# EAGLE board PowerNode2 (EAGLE 9.2.2)
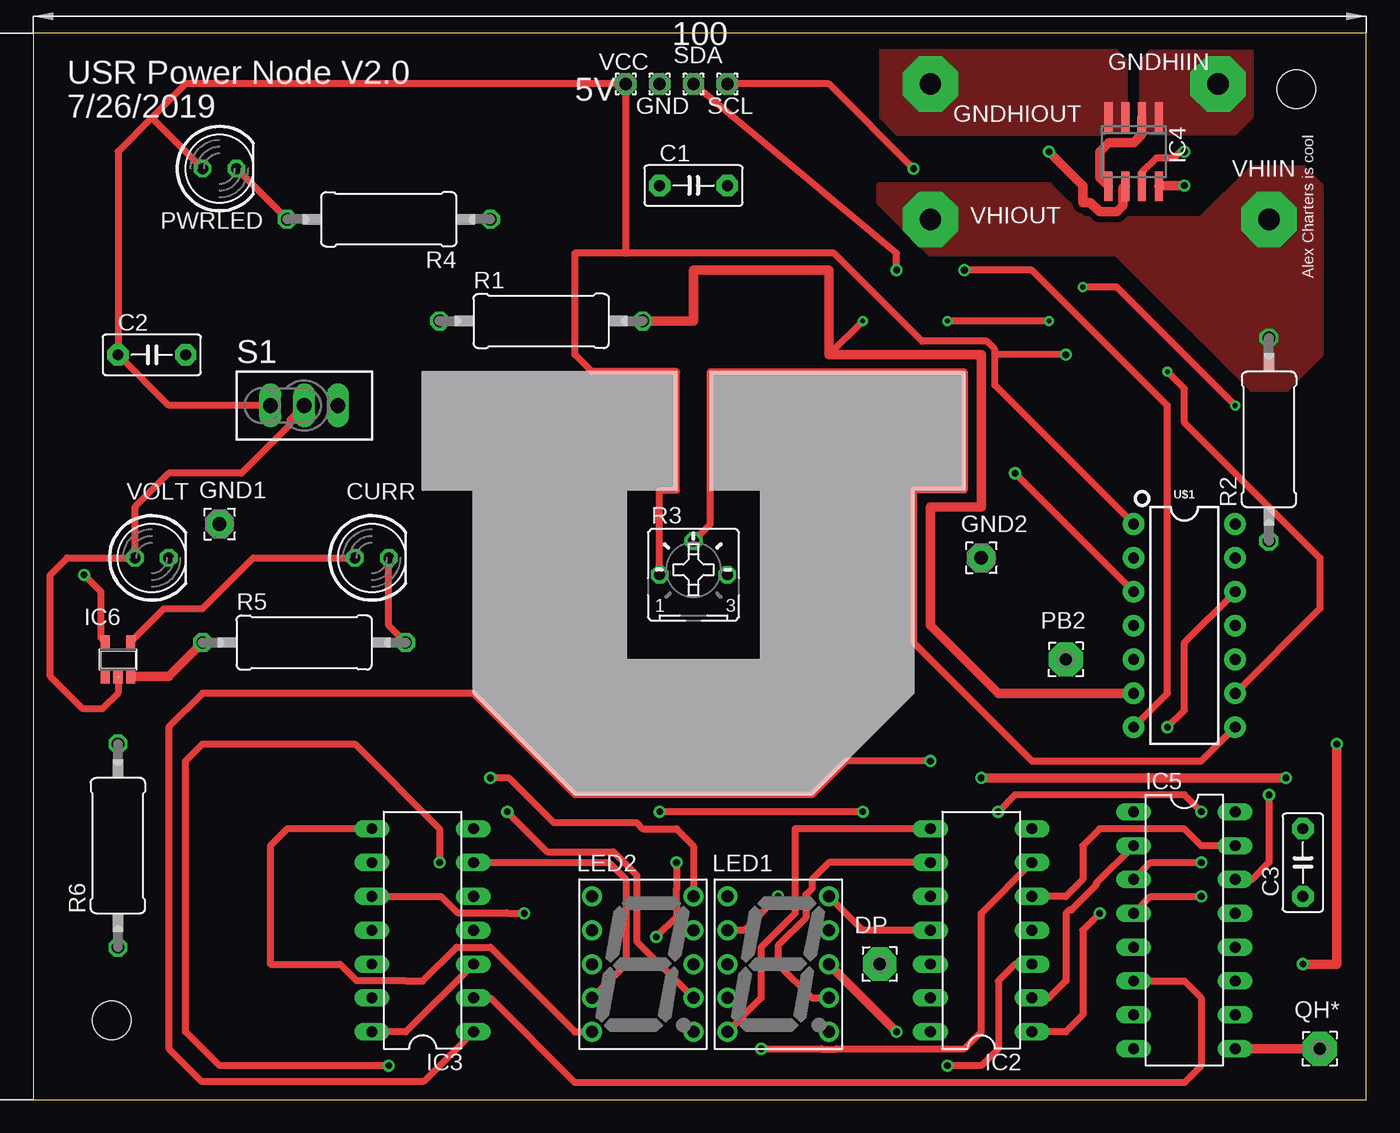
[diagram p0: board, top side]
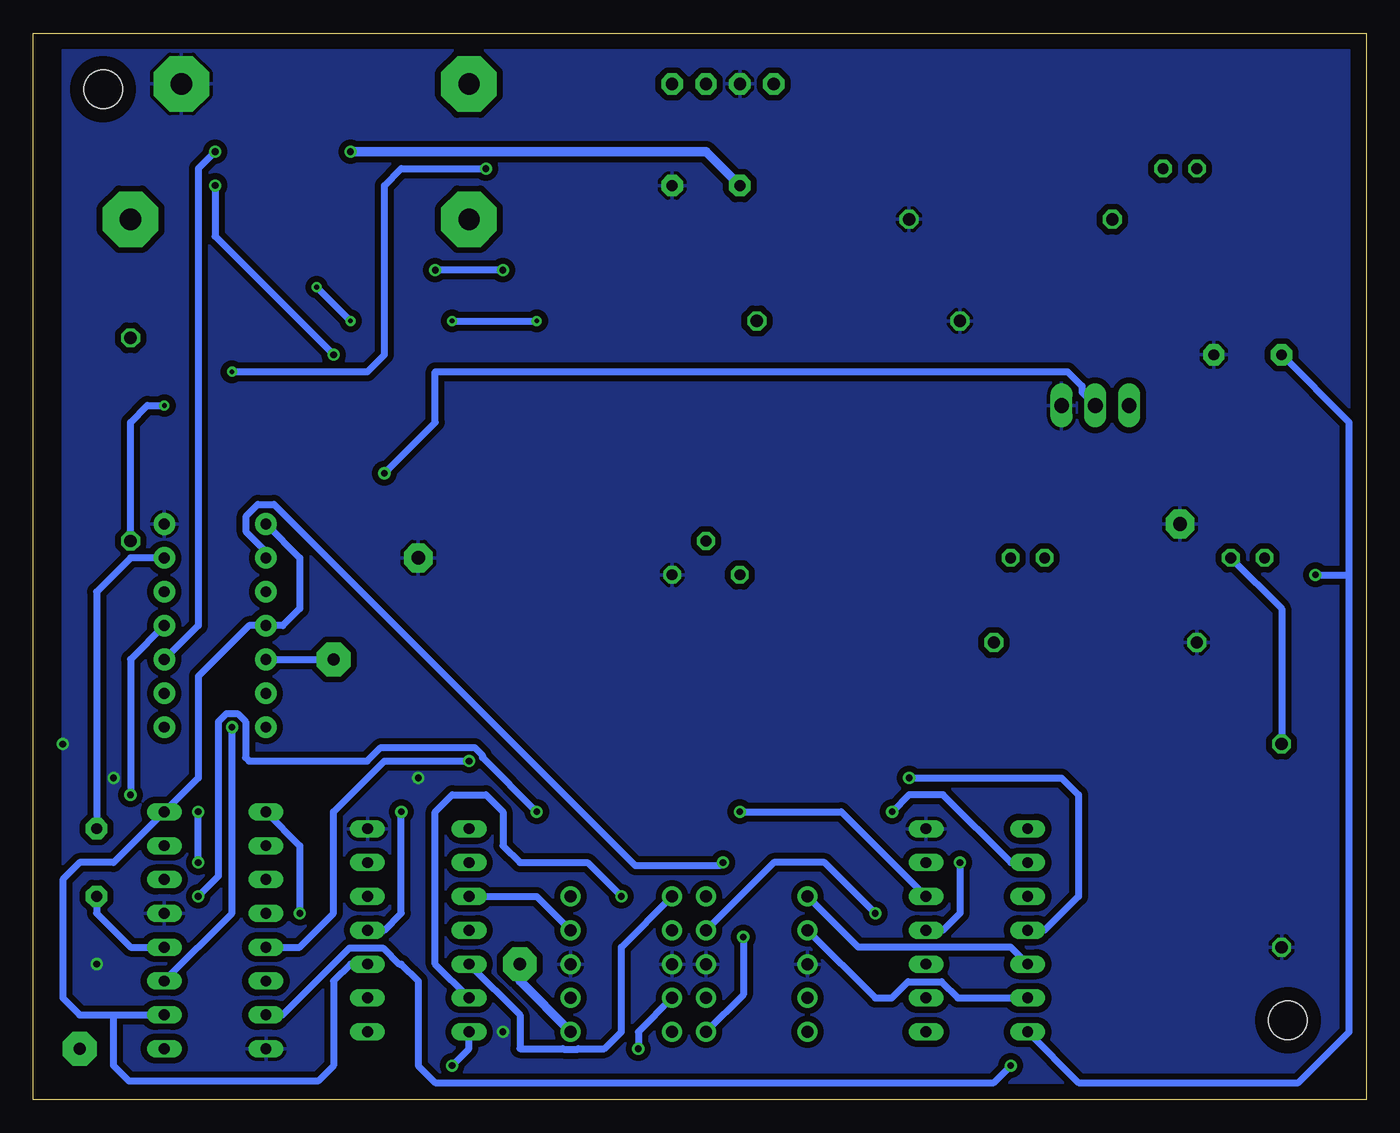
[diagram p1: board, bottom side, seen from below]

Size 100 x 80 mm. Coordinates in mm from the lower left corner, seen from the top.
Outline: 0,0 100,0 100,80 0,80 0,0
Copper layers (1*16): Top 0.035mm / dielectric 1.5mm / Bottom 0.035mm
Design rules "default": minimum track width 6mil, minimum drill 0.35mm, track to track 6mil, track to pad 6mil, pad to pad 6mil, via to via 6mil, smd to smd 6mil, copper to edge 40mil, drill to drill 6mil, minimum pad ring 10mil, minimum via ring 8mil, stop-mask expansion 4mil, vias tented up to drill 0mil, thermal gap 10mil
Net classes: 0 default: width 0.508 mm, drill 0.305 mm, clearance 0.305 mm; 1 high power: width 0.711 mm, drill 0.457 mm, clearance 0.457 mm
Holes 2.9 mm at 5.87,5.95 94.77,75.8

## Footprints (pad centres in the part's own frame; a part is rotated, then mirrored left to right if it is on the bottom)
C5B3 = drill 0.813 pad 1.6 octagon: 1 -2.54,0; 2 2.54,0
LED5MM = drill 0.813 octagon: A -1.27,0; K 1.27,0
2,54/0,9 = drill 0.914 pad 2.54 octagon: 1 0,0
1,6/0,9 = drill 0.914 pad 1.6 octagon: 1 0,0
2,15/1,0 = drill 1.016 pad 2.159 octagon: 1 0,0
4,16O1,6 = drill 1.6 pad 4.166 octagon: 1 0,0
DIL14 = drill 0.813 long: 1 -7.62,-3.81; 2 -5.08,-3.81; 3 -2.54,-3.81; 4 0,-3.81; 5 2.54,-3.81; 6 5.08,-3.81; 7 7.62,-3.81; 8 7.62,3.81; 9 5.08,3.81; 10 2.54,3.81; 11 0,3.81; 12 -2.54,3.81; 13 -5.08,3.81; 14 -7.62,3.81
SOIC8 = smd 0.6 x 2.2: 1 -1.905,-2.6; 2 -0.635,-2.6; 3 0.635,-2.6; 4 1.905,-2.6; 5 1.905,2.6; 6 0.635,2.6; 7 -0.635,2.6; 8 -1.905,2.6
DIL16 = drill 0.813 long: 1 -8.89,-3.81; 2 -6.35,-3.81; 3 -3.81,-3.81; 4 -1.27,-3.81; 5 1.27,-3.81; 6 3.81,-3.81; 7 6.35,-3.81; 8 8.89,-3.81; 9 8.89,3.81; 10 6.35,3.81; 11 3.81,3.81; 12 1.27,3.81; 13 -1.27,3.81; 14 -3.81,3.81; 15 -6.35,3.81; 16 -8.89,3.81
SOT23-5 = smd 0.69 x 0.99: 1 -0.95,-1.29; 2 0,-1.29; 3 0.95,-1.29; 4 0.95,1.3; 5 -0.95,1.3
S4301B = drill 0.9 pad 1.5: 1 -3.81,5.08; 2 -3.81,2.54; 3 -3.81,0; 4 -3.81,-2.54; 5 -3.81,-5.08; 6 3.81,-5.08; 7 3.81,-2.54; 8 3.81,0; 9 3.81,2.54; 10 3.81,5.08
0411/15 = drill 0.914 octagon: 1 -7.62,0; 2 7.62,0
B25P = drill 0.813 octagon: A -2.54,0; E 2.54,0; S 0,2.54
TL3XPO = drill 1.1 pad 1.422 long: 1 -2.54,0; 2 0,0; 3 2.54,0
DIP14 = drill 0.813 pad 1.626: 1 -7.62,-3.81; 2 -5.08,-3.81; 3 -2.54,-3.81; 4 0,-3.81; 5 2.54,-3.81; 6 5.08,-3.81; 7 7.62,-3.81; 8 7.62,3.81; 9 5.08,3.81; 10 2.54,3.81; 11 0,3.81; 12 -2.54,3.81; 13 -5.08,3.81; 14 -7.62,3.81

## Placement (x,y rotation side)
C1  1nF  [C5B3]  49.53,68.58 0 top
C2  0.1uF  [C5B3]  8.89,55.88 0 top
C3  0.1uF  [C5B3]  95.25,17.78 90 top
CURR  [LED5MM]  25.4,40.64 0 top
DP  [2,54/0,9]  63.5,10.16 0 top
GND  WIREPAD1,6/0,9  [1,6/0,9]  46.99,76.2 0 top
GND1  [2,15/1,0]  13.97,43.18 0 top
GND2  [2,15/1,0]  71.12,40.64 0 top
GNDHIIN  WIREPAD4,16O1,6  [4,16O1,6]  88.9,76.2 0 top
GNDHIOUT  WIREPAD4,16O1,6  [4,16O1,6]  67.31,76.2 0 top
IC2  74LS49N  [DIL14]  71.12,12.7 90 top
IC3  74LS49N  [DIL14]  29.21,12.7 90 top
IC4  ACS712-LC  [SOIC8]  82.55,71.12 180 top
IC5  74LS595N  [DIL16]  86.36,12.7 270 top
IC6  74AHCT1G04DBV  [SOT23-5]  6.35,33.02 0 top
LED1  S4301B  [S4301B]  55.88,10.16 0 top
LED2  S4301B  [S4301B]  45.72,10.16 0 top
PB2  [2,54/0,9]  77.47,33.02 0 top
PWRLED  [LED5MM]  13.97,69.85 0 top
QH*  [2,54/0,9]  96.52,3.81 0 top
R1  300k  [0411/15]  38.1,58.42 0 top
R2  1.2M  [0411/15]  92.71,49.53 90 top
R3  [B25P]  49.53,39.37 0 top
R4  330  [0411/15]  26.67,66.04 180 top
R5  330  [0411/15]  20.32,34.29 0 top
R6  330  [0411/15]  6.35,19.05 90 top
S1  TL32PO  [TL3XPO]  20.32,52.07 0 top
SCL  WIREPAD1,6/0,9  [1,6/0,9]  52.07,76.2 0 top
SDA  WIREPAD1,6/0,9  [1,6/0,9]  49.53,76.2 0 top
U$1  ATTINY84ATTINY84-20PU  [DIP14]  86.36,35.56 270 top
VCC  WIREPAD1,6/0,9  [1,6/0,9]  44.45,76.2 0 top
VHIIN  WIREPAD4,16O1,6  [4,16O1,6]  92.71,66.04 0 top
VHIOUT  WIREPAD4,16O1,6  [4,16O1,6]  67.31,66.04 0 top
VOLT  [LED5MM]  8.89,40.64 0 top

## Library data of the parts
C1-C3 = capacitor-wima
CURR PWRLED VOLT = led
DP GND GND1 GND2 GNDHIIN GNDHIOUT PB2 QH* SCL SDA VCC VHIIN VHIOUT = wirepad
IC2 IC3 IC5 = 74xx-us
IC4 = allegro-2
IC6 = 74xx-little-de
LED1 LED2 = led-7-segment; OC_FARNELL: unknown; OC_NEWARK: unknown
R1 R2 R4-R6 = resistor
R3 = pot
S1 = switch
U$1 = SparkFun-IC-Microcontroller

## Nets
CALIB: R3.S U$1.8
CURRIN: IC4.7 U$1.10
DISPSEL: IC6.2 S1.2 U$1.3 VOLT.A
GND [high power]: C1.2 C2.2 GND1.1 GND2.1 GND.1 GNDHIIN.1 IC2.7 IC3.7 IC4.1 IC4.2 IC4.5 IC5.8 IC5.13 IC6.3 LED1.3 LED1.8 LED2.3 LED2.8 R1.1 R3.E R4.1 R5.1 R6.1 S1.3 U$1.14
GNDHIOUT: GNDHIOUT.1 IC4.3 IC4.4
N$1: C1.1 IC4.6
N$2: IC5.14 U$1.11
N$3: IC2.6 LED1.4
N$4: SCL.1 U$1.9
N$6: SDA.1 U$1.7
N$7: IC2.8 LED1.5
N$8: IC2.9 LED1.7
N$9: IC2.10 LED1.9
N$10: IC2.11 LED1.10
N$11: IC2.12 LED1.1
N$12: IC2.13 LED1.2
N$13: IC3.13 LED2.2
N$14: IC3.8 LED2.5
N$15: IC3.10 LED2.9
N$16: IC3.11 LED2.10
N$17: IC3.9 LED2.7
N$18: IC3.6 LED2.4
N$19: IC3.12 LED2.1
N$20: IC2.5 IC5.15
N$21: IC2.1 IC5.1
N$22: IC2.2 IC5.2
N$23: IC2.4 IC5.3
N$24: IC3.5 IC5.4
N$25: IC3.1 IC5.5
N$26: IC3.2 IC5.6
N$27: IC3.4 IC5.7
N$28: IC5.11 U$1.12
N$29: C3.1 IC5.12
N$30: C3.2 U$1.13
N$31: LED2.6 U$1.2
N$32: PB2.1 U$1.5
N$33: PWRLED.K R4.2
N$34: CURR.K R5.2
N$35: R6.2 VOLT.K
N$36: CURR.A IC6.4
N$37: IC5.9 QH*.1
N$39: DP.1 LED1.6
VCC: C2.1 IC2.3 IC2.14 IC3.3 IC3.14 IC4.8 IC5.10 IC5.16 IC6.5 PWRLED.A R3.A S1.1 U$1.1 U$1.4 VCC.1
VHI [high power]: R2.2 VHIIN.1 VHIOUT.1
VHIOUT: R1.2 R2.1 U$1.6

## Tracks (layer width: path | path; a pad name or v marks a point on that pad's centre or on a via)
CALIB
  Top 0.508: R3.S 50.8,43.18 50.8,54.61 69.85,54.61 69.85,45.72 66.04,45.72 66.04,34.29 74.93,25.4 87.63,25.4 U$1.8
CURRIN  (via drill 0.5 pad 0.55)
  Top 0.508: v86.36,71.12 86.06,71.12 85.58,70.64 84.24,70.64 83.19,69.58 IC4.7
  Bottom 0.508: v86.36,71.12 87.63,69.85 87.63,35.56 U$1.10
DISPSEL  (via drill 0.5 pad 0.55)
  Top 0.508: S1.2 19.27,51.02 19.27,50.63 15.63,46.99 10.16,46.99 7.62,44.45 VOLT.A 2.54,40.64 1.27,39.37 1.27,31.75 3.71,29.31 5.18,29.31 6.35,30.48 IC6.2 | U$1.3 v73.66,46.99
  Bottom 0.508: v73.66,46.99 69.85,50.8 69.85,54.61 22.4,54.61 21.32,53.53 21.32,53.07 S1.2
GND  (via drill 0.5 pad 0.55)
  Top 0.711: v71.12,24.13 v93.98,24.13 | IC6.3 10.14,31.73 R5.1 | v95.25,10.16 97.79,10.16 v97.79,26.67 | LED1.8 v64.77,5.08 | IC4.5 80.01,69.16 80.01,71.12 80.7,71.81 82.55,71.81 83.19,72.44 IC4.2
  pour Bottom: 1.27,78.74 97.79,78.74 97.79,1.27 1.27,1.27
  pour Top (no thermals): 91.44,78.74 91.44,73.66 90.17,72.39 83.82,72.39 83.06,73.15 83.06,73.91 83.06,77.98 83.82,78.74
GNDHIOUT
  pour Top (no thermals): 63.5,78.74 63.5,73.66 64.77,72.39 66.04,72.39 81.28,72.39 82.04,73.15 82.04,77.98 81.28,78.74
N$1  (via drill 0.5 pad 0.55)
  Top 0.711: v76.2,71.12 78.74,68.58 78.74,67.31 79.31,67.31 80.01,66.61 81.28,66.61 81.76,67.08 81.76,68.36 IC4.6
  Bottom 0.711: v76.2,71.12 49.53,71.12 C1.1
N$2  (via drill 0.5 pad 0.55)
  Top 0.508: v92.71,22.86 92.71,17.78 91.44,16.51 IC5.14
  Bottom 0.508: U$1.11 92.71,33.02 v92.71,22.86
N$3  (via drill 0.5 pad 0.55)
  Top 0.508: v54.61,3.81 59.11,3.81 59.15,3.77 60.23,3.77 60.27,3.81 69.85,3.81 71.12,5.08 71.12,13.97 IC2.6
  Bottom 0.508: LED1.4 54.61,5.08 v54.61,3.81
N$4  (via drill 0.35, 0.5)
  Top 0.508: U$1.9 96.52,36.83 96.52,40.64 86.36,50.8 86.36,53.34 v85.09,54.61 | v66.04,69.85 59.69,76.2 SCL.1
  Bottom 0.508: v66.04,69.85 72.39,69.85 73.66,68.58 73.66,55.88 74.93,54.61 v85.09,54.61
N$6  (via drill 0.5)
  Top 0.508: U$1.7 85.09,30.48 85.09,52.07 74.93,62.23 v69.85,62.23 | v64.77,62.23 64.77,63.5 SDA.1
  Bottom 0.508: v64.77,62.23 v69.85,62.23
N$7
  Top 0.508: IC2.8 57.15,20.32 57.15,13.97 54.61,11.43 54.61,7.62 LED1.5
N$8
  Top 0.508: IC2.9 59.69,17.78 58.42,16.51 58.42,15.82 57.96,15.36 57.96,13.63 55.88,11.55 55.88,10.16 58.42,7.62 LED1.7
N$9
  Bottom 0.508: IC2.10 62.23,15.24 LED1.9
N$10
  Top 0.508: IC2.11 62.23,12.7 LED1.10
N$11
  Bottom 0.508: IC2.12 63.5,6.35 63.5,3.81 60.27,3.81 60.23,3.77 59.15,3.77 59.11,3.81 57.15,3.81 55.88,5.08 55.88,11.43 LED1.1
N$12  (via drill 0.5 pad 0.55)
  Top 0.508: v55.88,15.24 53.34,12.7 LED1.2
  Bottom 0.508: IC2.13 69.85,10.16 69.85,21.59 68.58,22.86 66.04,22.86 64.77,21.59 64.77,19.05 63.5,17.78 58.42,17.78 v55.88,15.24
N$13
  Bottom 0.508: LED2.2 36.83,7.62 35.58,7.62 34.36,8.84 31.86,8.84 30.64,7.62 IC3.13
N$14
  Top 0.508: IC3.8 19.05,20.32 17.78,19.05 17.78,10.16 23.02,10.16 24.23,8.94 27.89,8.94 27.94,8.89 29.21,8.89 31.75,11.43 34.29,11.43 40.64,5.08 LED2.5
N$15  (via drill 0.5 pad 0.55)
  Top 0.508: IC3.10 30.6,15.24 31.82,14.02 35.51,14.02 35.56,13.97 v36.83,13.97
  Bottom 0.508: v36.83,13.97 40.64,17.78 44.45,17.78 LED2.9
N$16  (via drill 0.5 pad 0.55)
  Top 0.508: v34.29,24.13 35.68,24.13 39.03,20.78 45.26,20.78 45.72,20.32 48.26,20.32 49.53,19.05 LED2.10
  Bottom 0.508: v34.29,24.13 22.86,24.13 21.59,22.86 21.59,15.24 24.13,12.7 IC3.11
N$17  (via drill 0.5 pad 0.55)
  Top 0.508: v35.56,21.59 38.56,18.59 43.52,18.59 45.26,16.85 45.26,11.89 LED2.7
  Bottom 0.508: IC3.9 26.67,17.78 31.75,22.86 34.29,22.86 v35.56,21.59
N$18
  Top 0.508: LED2.4 44.45,10.16 44.45,16.51 43.18,17.78 IC3.6
N$19
  Bottom 0.508: IC3.12 26.67,11.43 38.1,11.43 LED2.1
N$20
  Top 0.508: IC5.15 87.62,19.05 86.35,20.32 80.01,20.32 78.74,19.05 78.74,16.51 77.47,15.24 IC2.5
N$21  (via drill 0.5 pad 0.55)
  Top 0.508: v80.01,13.97 78.74,12.7 78.74,6.35 77.47,5.08 IC2.1
  Bottom 0.508: IC5.1 80.01,19.05 v80.01,13.97
N$22
  Top 0.508: IC5.2 79.76,16.26 79.76,16.09 77.89,14.22 77.72,14.22 77.47,13.97 77.47,8.89 76.2,7.62 IC2.2
N$23  (via drill 0.5 pad 0.55)
  Top 0.508: v72.39,21.59 73.66,22.86 86.36,22.86 v87.63,21.59 | IC5.3 83.82,17.78 v87.63,17.78
  Bottom 0.508: IC2.4 73.66,12.7 72.39,13.97 v72.39,21.59 | v87.63,17.78 v87.63,21.59
N$24  (via drill 0.5 pad 0.55)
  Top 0.508: IC5.4 83.82,15.24 v87.63,15.24 | v62.23,21.59 v46.99,21.59
  Bottom 0.508: v87.63,15.24 86.1,16.77 86.1,28.36 85.51,28.95 84.67,28.95 84.08,28.36 84.08,25.66 83.82,25.4 74.95,25.4 73.94,26.41 66.89,26.41 66.3,25.82 66.3,25.66 v62.23,21.59 | v46.99,21.59 39.37,21.59 IC3.5
N$25  (via drill 0.5 pad 0.55)
  Top 0.508: v67.31,25.4 60.96,25.4 58.42,22.86 40.64,22.86 33.02,30.48 12.7,30.48 10.16,27.94 10.16,3.81 12.6,1.37 29.31,1.37 IC3.1
  Bottom 0.508: IC5.5 80.01,11.43 77.47,13.97 77.47,21.59 73.66,25.4 v67.31,25.4
N$26
  Top 0.508: IC5.6 86.36,8.89 87.63,7.62 87.63,2.54 86.36,1.27 40.64,1.27 34.29,7.62 IC3.2
N$27  (via drill 0.5 pad 0.55)
  Top 0.508: v26.67,2.54 13.97,2.54 11.43,5.08 11.43,25.4 12.7,26.67 24.13,26.67 30.48,20.32 v30.48,17.78
  Bottom 0.508: IC5.7 81.3,6.35 76.27,11.38 73.77,11.38 72.55,10.16 72.39,10.16 71.12,8.89 71.12,2.54 69.85,1.27 27.94,1.27 v26.67,2.54 | IC3.4 31.75,12.7 30.48,13.97 v30.48,17.78
N$28  (via drill 0.5 pad 0.55)
  Top 0.508: v85.09,27.94 86.36,29.21 86.36,34.29 U$1.12
  Bottom 0.508: IC5.11 85.09,13.97 v85.09,27.94
N$29
  Bottom 0.508: C3.1 95.25,13.97 92.71,11.43 IC5.12
N$30
  Bottom 0.508: U$1.13 92.71,40.64 95.25,38.1 C3.2
N$31  (via drill 0.5 pad 0.55)
  Top 0.508: v46.74,12.19 48.26,13.72 48.26,14.66 48.22,14.7 48.22,15.78 48.26,15.82 v48.26,17.78
  Bottom 0.508: U$1.2 82.55,41.1 84.02,42.57 84.02,43.79 83.16,44.65 81.94,44.65 54.84,17.55 48.49,17.55 v48.26,17.78 | v46.74,12.19 46.74,7.87 LED2.6
N$32
  Bottom 0.508: U$1.5 PB2.1
N$33
  Top 0.508: R4.2 PWRLED.K
N$34
  Top 0.508: R5.2 26.67,35.56 CURR.K
N$35
  Bottom 0.508: VOLT.K 6.35,36.83 R6.2
N$36
  Top 0.508: IC6.4 9.81,36.83 12.7,36.83 16.51,40.64 CURR.A
N$37
  Top 0.711: QH*.1 IC5.9
N$39
  Bottom 0.711: LED1.6 63.5,8.89 DP.1
VCC  (via drill 0.5 pad 0.55)
  Top 0.508: 8.89,73.66 11.43,76.2 VCC.1 44.45,63.5 | 8.89,73.66 6.35,71.12 C2.1 10.16,52.07 S1.1 | R3.A 46.99,45.72 48.26,45.72 48.26,54.61 41.91,54.61 40.64,55.88 40.64,63.5 44.45,63.5 | U$1.1 72.14,53.59 72.14,55.88 | 72.14,55.88 72.14,56.3 71.54,56.9 66.68,56.9 60.08,63.5 44.45,63.5 | v77.47,55.88 72.14,55.88 | IC3.3 27.94,5.08 IC3.14 | IC6.5 5.08,34.64 5.08,38.1 v3.81,39.37 | PWRLED.A 8.89,73.66 | IC2.3 73.66,10.16 72.39,8.89 72.39,3.81 71.12,2.54 v68.58,2.54
  Top 0.711: IC4.8 84.52,68.58 v86.36,68.58
  Bottom 0.508: IC3.14 21.59,1.27 5.08,1.27 1.27,5.08 1.27,39.37 | 1.27,39.37 1.27,50.8 C2.1 | v86.36,68.58 86.36,64.77 v77.47,55.88 | U$1.1 80.01,40.64 80.01,36.83 81.28,35.56 U$1.4 83.82,35.56 87.63,31.75 87.63,24.13 IC5.16 93.98,17.78 96.52,17.78 97.79,16.51 97.79,7.62 96.52,6.35 93.98,6.35 | 93.98,6.35 IC5.10 | IC2.3 76.2,10.16 77.47,8.89 77.47,2.54 78.64,1.37 92.81,1.37 93.98,2.54 93.98,6.35 | v3.81,39.37 1.27,39.37 | v68.58,2.54 67.31,3.81 IC2.14
VHI
  pour Top (no thermals): 63.5,68.58 74.93,68.58 76.2,68.58 78.74,66.04 87.63,66.04 91.44,69.85 95.25,69.85 96.52,68.58 96.52,55.88 93.98,53.34 91.44,53.34 81.28,63.5 67.31,63.5 63.5,67.31
VHIOUT  (via drill 0.35)
  Top 0.508: v90.17,52.07 81.28,60.96 v78.74,60.96 | v76.2,58.42 v68.58,58.42 | v62.23,58.42 59.69,55.88
  Top 0.711: R1.2 49.53,58.42 49.53,62.23 59.69,62.23 59.69,55.88 71.12,55.88 71.12,44.45 67.31,44.45 67.31,35.56 72.39,30.48 U$1.6
  Bottom 0.508: R2.1 92.71,50.8 91.44,52.07 v90.17,52.07 | v78.74,60.96 v76.2,58.42 | v68.58,58.42 v62.23,58.42

## Text on the board
tPlace: USR Power Node V2.0 | 5V | 7/26/2019 | Alex Charters is cool